# Altium PCB 9..11..13 filter.PcbDoc (part 1 of 2)
Units mil, origin at the board's own origin, x right, y up, seen from the top; angles counter-clockwise.
Board outline 3897.64 x 3897.64 mil, 2 copper layers (Top Layer, Bottom Layer); 210 components, 8 nets, 564 pads, 1454 vias.
Unrouted connection lines stored in the file: 121.
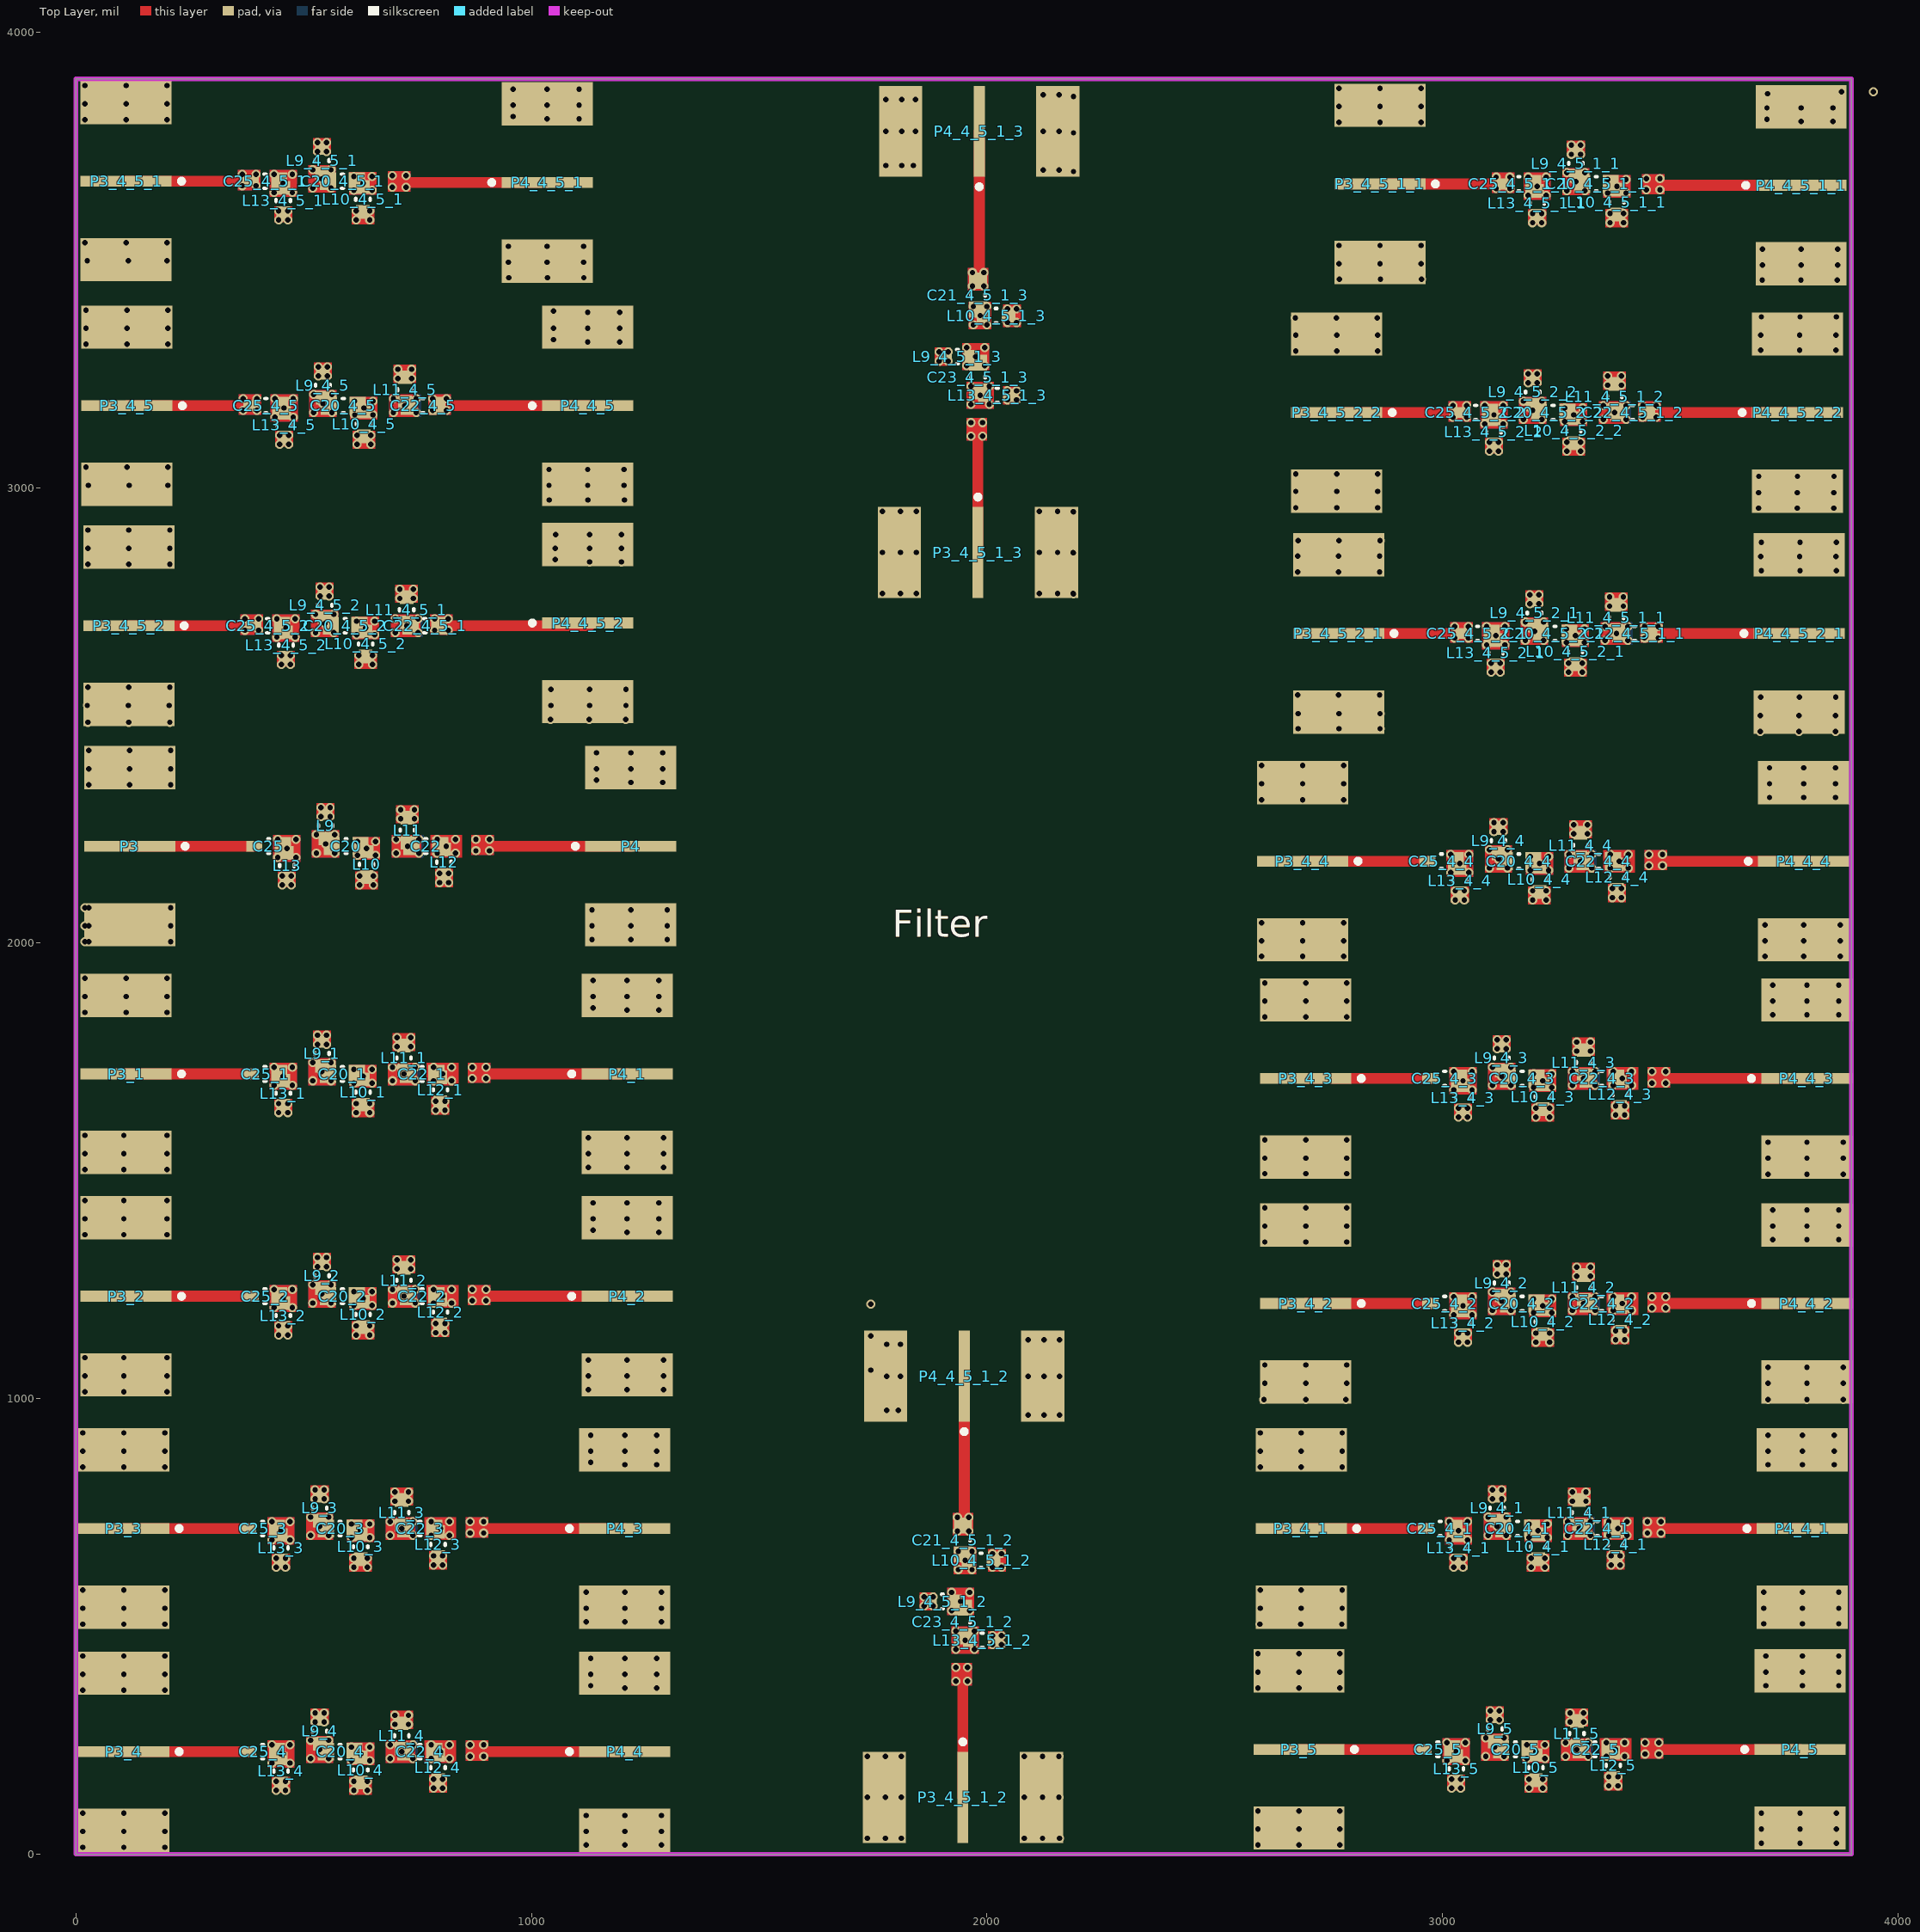
[diagram p0: Top Layer view]
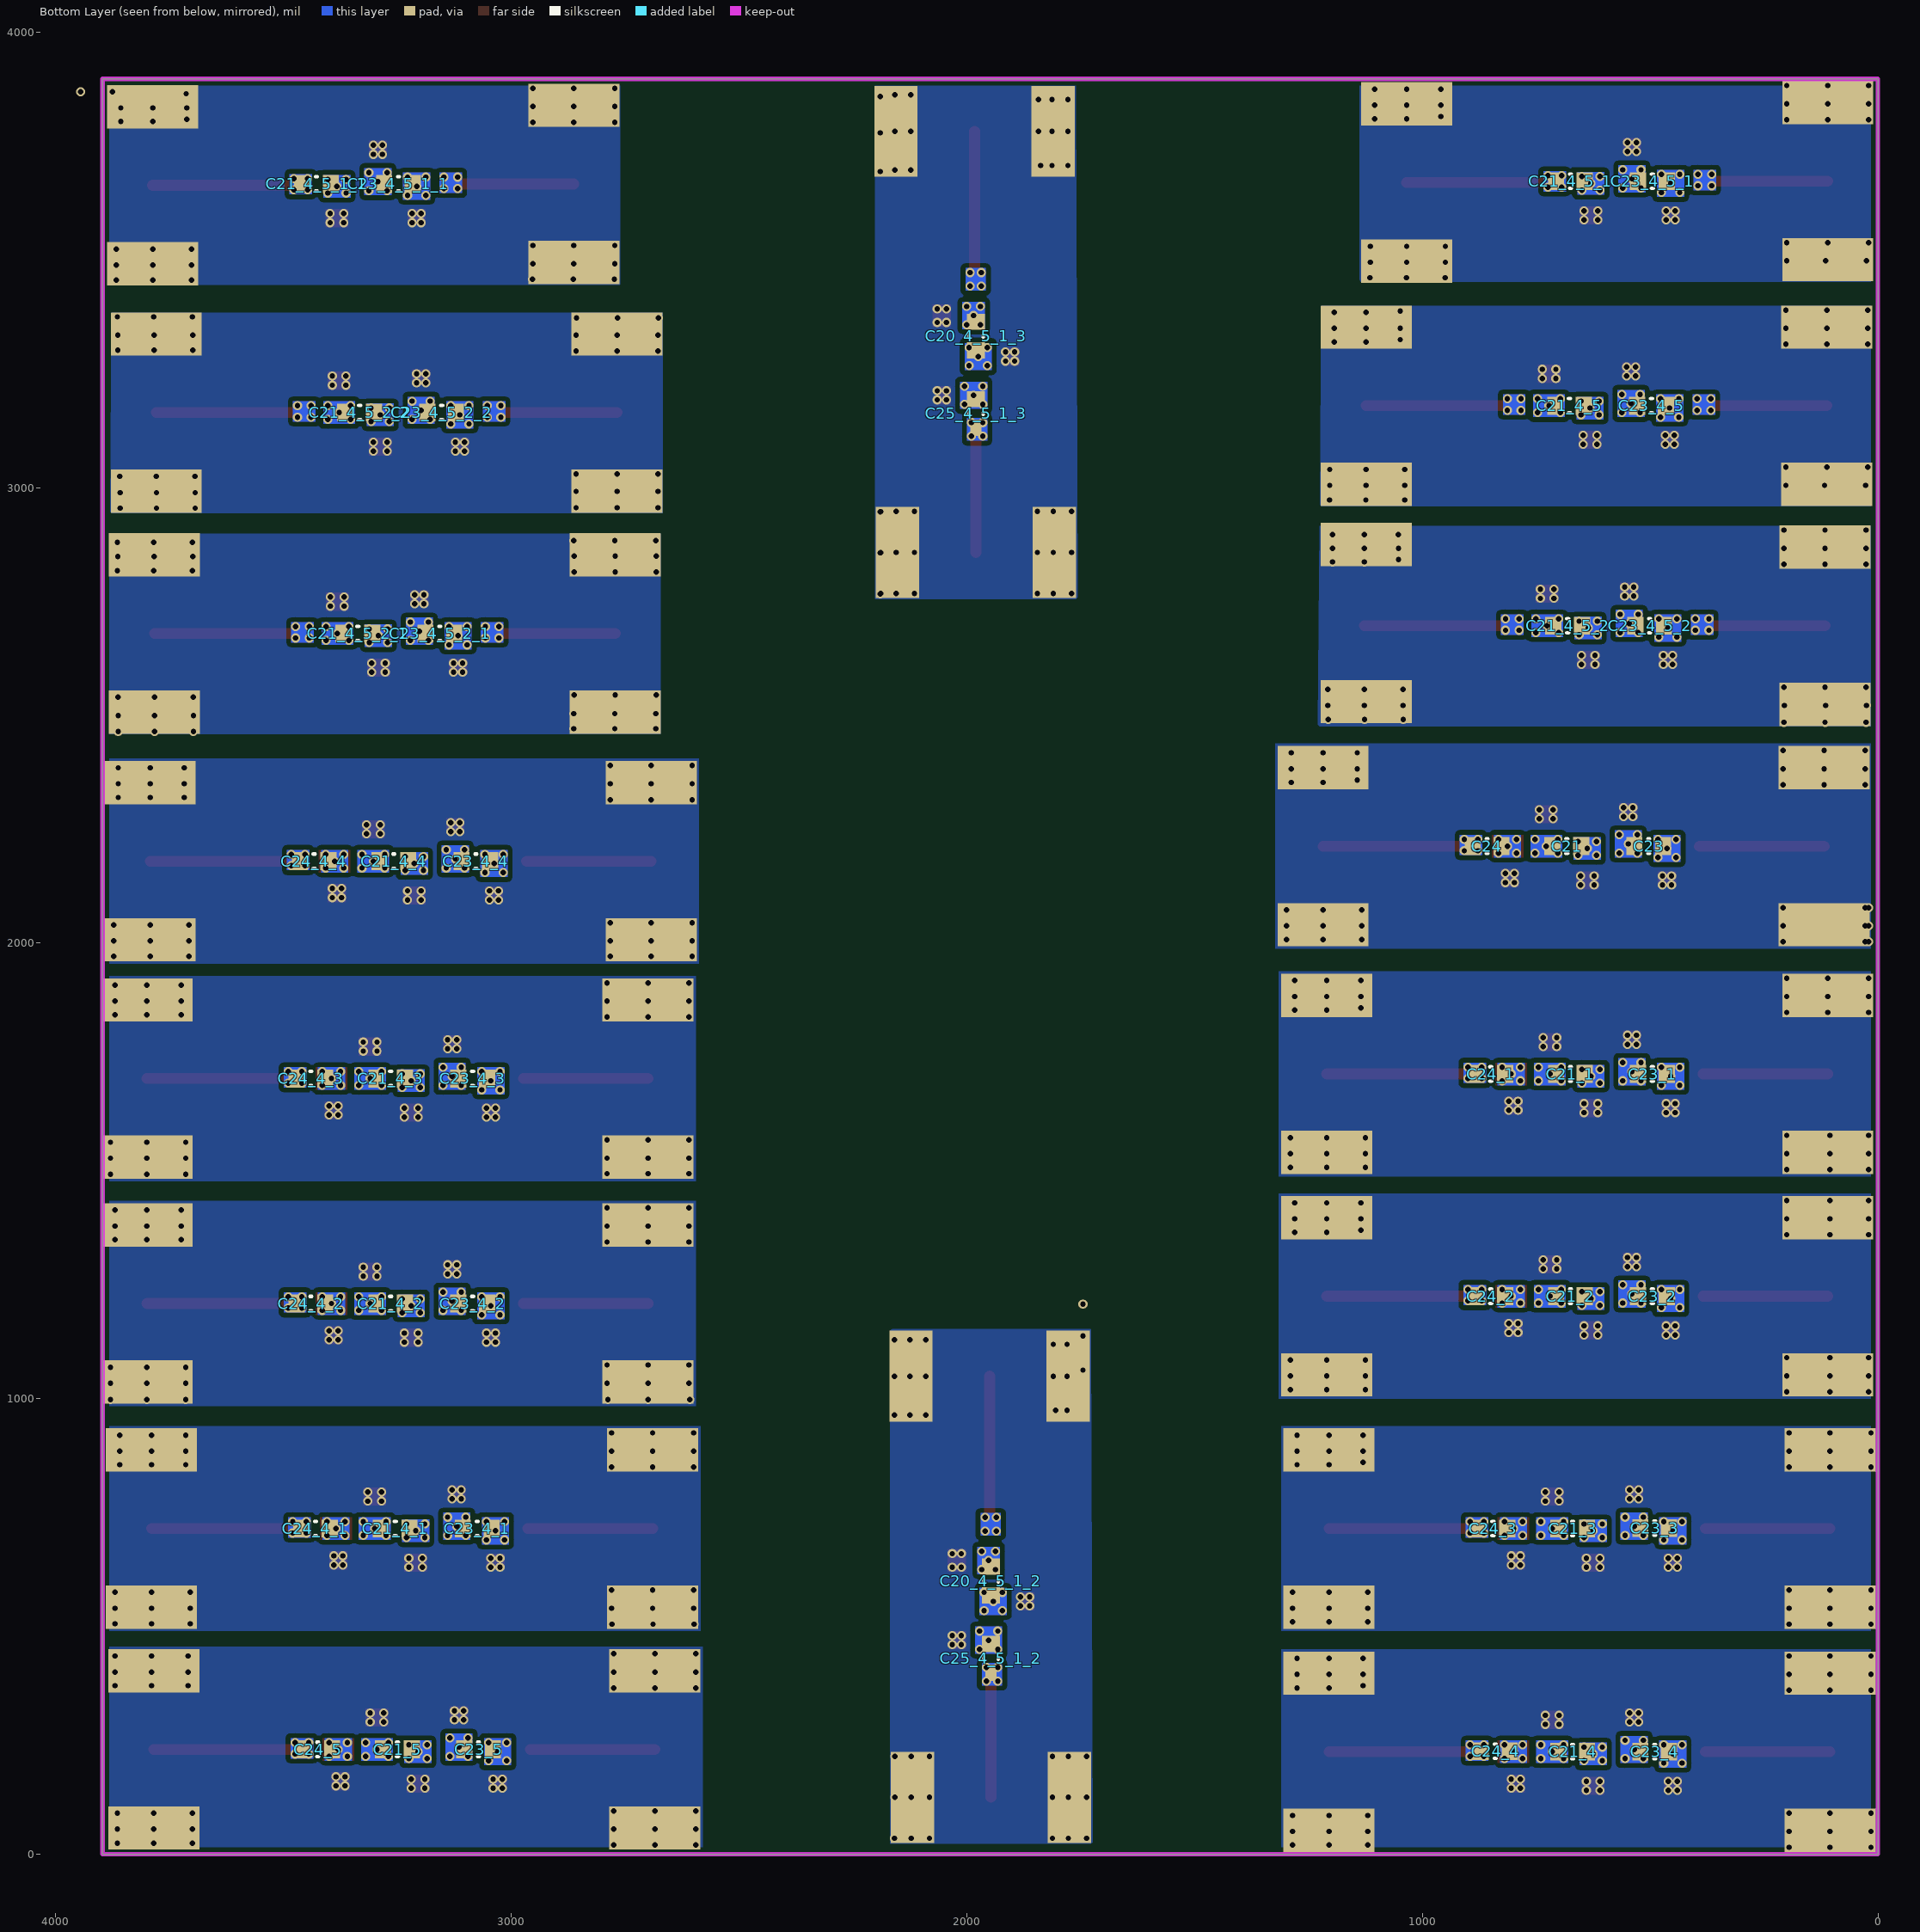
[diagram p1: Bottom Layer view, seen from below]

## Layer stack, top to bottom
Top Solder: solder mask 0.4, Solder Resist, Dk 3.5
Top Layer: signal copper 1.4
Dielectric 1: dielectric 12.6, FR-4, Dk 4.8
Bottom Layer: signal copper 1.4
Bottom Solder: solder mask 0.4, Solder Resist, Dk 3.5

## Board outline
0,0 3897.64,0 3897.64,3897.64 0,3897.64

## Design rules (kind name [scope] priority, off if disabled: settings)
Clearance [All] p1: gap=10 ignorepadtopadclearanceinfootprint=FALSE except(0: Arc-Hole Track-Hole SMDPad-Hole THPad-Hole Via-Hole Fill-Hole Poly-Hole Region-Hole Text-Hole)
PlaneConnect [All] p1: planeconnectstyle=Direct reliefexpansion=20 reliefentries=4 reliefconductorwidth=10 reliefairgap=10
PolygonConnect [All] p1: connectstyle=Direct reliefconductorwidth=10 reliefentries=4 polygonreliefangle="90 Angle" airgapwidth=10
RoutingVias [All] p1: holewidth=28 width=50 viastyle="Through Hole" minholewidth=28 minwidth=50 maxholewidth=28 maxwidth=50
SolderMaskExpansion [All] p1: expansion=4
Width [All] p1: maxlimit=24 minlimit=10 preferedwidth=24
29 further rules are at their usual default settings.

## Classes and differential pairs
component class Sheet1: C20 C21 C22 C23 C24 C25 L9 L10 L11 L12 L13 P3 P4

## Components (designator, comment, footprint, x,y, rotation, side; value= is the part's Value field where it differs from the comment)
C20 "100pF" 0603C#1 593,2213 r0 top
C20_1 "100pF" 0603C#1 585,1713 r0 top (schematic designator C20)
C20_2 "100pF" 0603C#1 585,1225 r0 top (schematic designator C20)
C20_3 "100pF" 0603C#1 580,715 r0 top (schematic designator C20)
C20_4 "100pF" 0603C#1 580,225 r0 top (schematic designator C20)
C20_4_1 "100pF" 0603C#1 3165,715 r0 top (schematic designator C20)
C20_4_2 "100pF" 0603C#1 3175,1209 r0 top (schematic designator C20)
C20_4_3 "100pF" 0603C#1 3175,1703 r0 top (schematic designator C20)
C20_4_4 "100pF" 0603C#1 3168,2180 r0 top (schematic designator C20)
C20_4_5 "100pF" 0603C#1 587,3180 r0 top (schematic designator C20)
C20_4_5_1 "100pF" 0603C#1 585,3673 r0 top (schematic designator C20)
C20_4_5_1_1 "100pF" 0603C#1 3337.88,3666.88 r0 top (schematic designator C20)
C20_4_5_1_2 "100pF" 0603C#1 1947.12,599.88 r90 bottom (schematic designator C20)
C20_4_5_1_3 "100pF" 0603C#1 1980.12,3332.88 r90 bottom (schematic designator C20)
C20_4_5_2 "100pF" 0603C#1 591,2697 r0 top (schematic designator C20)
C20_4_5_2_1 "100pF" 0603C#1 3247,2680 r0 top (schematic designator C20)
C20_4_5_2_2 "100pF" 0603C#1 3243,3165 r0 top (schematic designator C20)
C20_5 "100pF" 0603C#1 3160,230 r0 top (schematic designator C20)
C21 "100pF" 0603C#1 683,2213 r0 bottom
C21_1 "100pF" 0603C#1 675,1713 r0 bottom (schematic designator C21)
C21_2 "100pF" 0603C#1 675,1225 r0 bottom (schematic designator C21)
C21_3 "100pF" 0603C#1 670,715 r0 bottom (schematic designator C21)
C21_4 "100pF" 0603C#1 670,225 r0 bottom (schematic designator C21)
C21_4_1 "100pF" 0603C#1 3255,715 r0 bottom (schematic designator C21)
C21_4_2 "100pF" 0603C#1 3265,1209 r0 bottom (schematic designator C21)
C21_4_3 "100pF" 0603C#1 3265,1703 r0 bottom (schematic designator C21)
C21_4_4 "100pF" 0603C#1 3258,2180 r0 bottom (schematic designator C21)
C21_4_5 "100pF" 0603C#1 677,3180 r0 bottom (schematic designator C21)
C21_4_5_1 "100pF" 0603C#1 675,3673 r0 bottom (schematic designator C21)
C21_4_5_1_1 "100pF" 0603C#1 3427.88,3666.88 r0 bottom (schematic designator C21)
C21_4_5_1_2 "100pF" 0603C#1 1947.12,689.88 r270 top (schematic designator C21)
C21_4_5_1_3 "100pF" 0603C#1 1980.12,3422.88 r270 top (schematic designator C21)
C21_4_5_2 "100pF" 0603C#1 681,2697 r0 bottom (schematic designator C21)
C21_4_5_2_1 "100pF" 0603C#1 3337,2680 r0 bottom (schematic designator C21)
C21_4_5_2_2 "100pF" 0603C#1 3333,3165 r0 bottom (schematic designator C21)
C21_5 "100pF" 0603C#1 3250,230 r0 bottom (schematic designator C21)
C22 "100pF" 0603C#1 768,2213 r0 top
C22_1 "100pF" 0603C#1 760,1713 r0 top (schematic designator C22)
C22_2 "100pF" 0603C#1 760,1225 r0 top (schematic designator C22)
C22_3 "100pF" 0603C#1 755,715 r0 top (schematic designator C22)
C22_4 "100pF" 0603C#1 755,225 r0 top (schematic designator C22)
C22_4_1 "100pF" 0603C#1 3340,715 r0 top (schematic designator C22)
C22_4_2 "100pF" 0603C#1 3350,1209 r0 top (schematic designator C22)
C22_4_3 "100pF" 0603C#1 3350,1703 r0 top (schematic designator C22)
C22_4_4 "100pF" 0603C#1 3343,2180 r0 top (schematic designator C22)
C22_4_5 "100pF" 0603C#1 762,3180 r0 top (schematic designator C22)
C22_4_5_1 "100pF" 0603C#1 766,2697 r0 top (schematic designator C22)
C22_4_5_1_1 "100pF" 0603C#1 3422,2680 r0 top (schematic designator C22)
C22_4_5_1_2 "100pF" 0603C#1 3418,3165 r0 top (schematic designator C22)
C22_5 "100pF" 0603C#1 3335,230 r0 top (schematic designator C22)
C23 "100pF" 0603C#1 503,2213 r0 bottom
C23_1 "100pF" 0603C#1 495,1713 r0 bottom (schematic designator C23)
C23_2 "100pF" 0603C#1 495,1225 r0 bottom (schematic designator C23)
C23_3 "100pF" 0603C#1 490,716 r0 bottom (schematic designator C23)
C23_4 "100pF" 0603C#1 490,225 r0 bottom (schematic designator C23)
C23_4_1 "100pF" 0603C#1 3075,715 r0 bottom (schematic designator C23)
C23_4_2 "100pF" 0603C#1 3085,1209 r0 bottom (schematic designator C23)
C23_4_3 "100pF" 0603C#1 3085,1703 r0 bottom (schematic designator C23)
C23_4_4 "100pF" 0603C#1 3078,2180 r0 bottom (schematic designator C23)
C23_4_5 "100pF" 0603C#1 497,3180 r0 bottom (schematic designator C23)
C23_4_5_1 "100pF" 0603C#1 495,3673 r0 bottom (schematic designator C23)
C23_4_5_1_1 "100pF" 0603C#1 3247.88,3666.88 r0 bottom (schematic designator C23)
C23_4_5_1_2 "100pF" 0603C#1 1947.12,509.88 r270 top (schematic designator C23)
C23_4_5_1_3 "100pF" 0603C#1 1980.12,3242.88 r270 top (schematic designator C23)
C23_4_5_2 "100pF" 0603C#1 501,2697 r0 bottom (schematic designator C23)
C23_4_5_2_1 "100pF" 0603C#1 3157,2680 r0 bottom (schematic designator C23)
C23_4_5_2_2 "100pF" 0603C#1 3153,3165 r0 bottom (schematic designator C23)
C23_5 "100pF" 0603C#1 3072,230 r0 bottom (schematic designator C23)
C24 "100pF" 0603C#1 858,2213 r0 bottom
C24_1 "100pF" 0603C#1 850,1713 r0 bottom (schematic designator C24)
C24_2 "100pF" 0603C#1 850,1225 r0 bottom (schematic designator C24)
C24_3 "100pF" 0603C#1 845,715 r0 bottom (schematic designator C24)
C24_4 "100pF" 0603C#1 840,226 r0 bottom (schematic designator C24)
C24_4_1 "100pF" 0603C#1 3430,715 r0 bottom (schematic designator C24)
C24_4_2 "100pF" 0603C#1 3440,1209 r0 bottom (schematic designator C24)
C24_4_3 "100pF" 0603C#1 3440,1703 r0 bottom (schematic designator C24)
C24_4_4 "100pF" 0603C#1 3433,2180 r0 bottom (schematic designator C24)
C24_5 "100pF" 0603C#1 3425,230 r0 bottom (schematic designator C24)
C25 "100pF" 0603C#2 423,2213 r0 top
C25_1 "100pF" 0603C#2 415,1713 r0 top (schematic designator C25)
C25_2 "100pF" 0603C#2 415,1225 r0 top (schematic designator C25)
C25_3 "100pF" 0603C#2 410,715 r0 top (schematic designator C25)
C25_4 "100pF" 0603C#2 410,225 r0 top (schematic designator C25)
C25_4_1 "100pF" 0603C#2 2995,715 r0 top (schematic designator C25)
C25_4_2 "100pF" 0603C#2 3005,1209 r0 top (schematic designator C25)
C25_4_3 "100pF" 0603C#2 3005,1703 r0 top (schematic designator C25)
C25_4_4 "100pF" 0603C#2 2998,2180 r0 top (schematic designator C25)
C25_4_5 "100pF" 0603C#2 417,3180 r0 top (schematic designator C25)
C25_4_5_1 "100pF" 0603C#2 415,3673 r0 top (schematic designator C25)
C25_4_5_1_1 "100pF" 0603C#2 3167.88,3666.88 r0 top (schematic designator C25)
C25_4_5_1_2 "100pF" 0603C#2 1947.12,429.88 r90 bottom (schematic designator C25)
C25_4_5_1_3 "100pF" 0603C#2 1980.12,3162.88 r90 bottom (schematic designator C25)
C25_4_5_2 "100pF" 0603C#2 421,2697 r0 top (schematic designator C25)
C25_4_5_2_1 "100pF" 0603C#2 3077,2680 r0 top (schematic designator C25)
C25_4_5_2_2 "100pF" 0603C#2 3073,3165 r0 top (schematic designator C25)
C25_5 "100pF" 0603C#2 2990,230 r0 top (schematic designator C25)
L9 "BEAD" 0603L 548,2258 r90 top value=100uH
L9_1 "BEAD" 0603L 540,1758 r90 top value=100uH (schematic designator L9)
L9_2 "BEAD" 0603L 540,1270 r90 top value=100uH (schematic designator L9)
L9_3 "BEAD" 0603L 535,760 r90 top value=100uH (schematic designator L9)
L9_4 "BEAD" 0603L 535,270 r90 top value=100uH (schematic designator L9)
L9_4_1 "BEAD" 0603L 3120,760 r90 top value=100uH (schematic designator L9)
L9_4_2 "BEAD" 0603L 3130,1254 r90 top value=100uH (schematic designator L9)
L9_4_3 "BEAD" 0603L 3130,1748 r90 top value=100uH (schematic designator L9)
L9_4_4 "BEAD" 0603L 3123,2225 r90 top value=100uH (schematic designator L9)
L9_4_5 "BEAD" 0603L 542,3225 r90 top value=100uH (schematic designator L9)
L9_4_5_1 "BEAD" 0603L 540,3718 r90 top value=100uH (schematic designator L9)
L9_4_5_1_1 "BEAD" 0603L 3292.88,3711.88 r90 top value=100uH (schematic designator L9)
L9_4_5_1_2 "BEAD" 0603L 1902.12,554.88 r180 top value=100uH (schematic designator L9)
L9_4_5_1_3 "BEAD" 0603L 1935.12,3287.88 r180 top value=100uH (schematic designator L9)
L9_4_5_2 "BEAD" 0603L 546,2742 r90 top value=100uH (schematic designator L9)
L9_4_5_2_1 "BEAD" 0603L 3202,2725 r90 top value=100uH (schematic designator L9)
L9_4_5_2_2 "BEAD" 0603L 3198,3210 r90 top value=100uH (schematic designator L9)
L9_5 "BEAD" 0603L 3115,275 r90 top value=100uH (schematic designator L9)
L10 "BEAD" 0603L 638,2173 r270 top value=100uH
L10_1 "BEAD" 0603L 630,1673 r270 top value=100uH (schematic designator L10)
L10_2 "BEAD" 0603L 630,1185 r270 top value=100uH (schematic designator L10)
L10_3 "BEAD" 0603L 625,675 r270 top value=100uH (schematic designator L10)
L10_4 "BEAD" 0603L 625,185 r270 top value=100uH (schematic designator L10)
L10_4_1 "BEAD" 0603L 3210,675 r270 top value=100uH (schematic designator L10)
L10_4_2 "BEAD" 0603L 3220,1169 r270 top value=100uH (schematic designator L10)
L10_4_3 "BEAD" 0603L 3220,1663 r270 top value=100uH (schematic designator L10)
L10_4_4 "BEAD" 0603L 3213,2140 r270 top value=100uH (schematic designator L10)
L10_4_5 "BEAD" 0603L 632,3140 r270 top value=100uH (schematic designator L10)
L10_4_5_1 "BEAD" 0603L 630,3633 r270 top value=100uH (schematic designator L10)
L10_4_5_1_1 "BEAD" 0603L 3382.88,3626.88 r270 top value=100uH (schematic designator L10)
L10_4_5_1_2 "BEAD" 0603L 1987.12,644.88 r0 top value=100uH (schematic designator L10)
L10_4_5_1_3 "BEAD" 0603L 2020.12,3377.88 r0 top value=100uH (schematic designator L10)
L10_4_5_2 "BEAD" 0603L 636,2657 r270 top value=100uH (schematic designator L10)
L10_4_5_2_1 "BEAD" 0603L 3292,2640 r270 top value=100uH (schematic designator L10)
L10_4_5_2_2 "BEAD" 0603L 3288,3125 r270 top value=100uH (schematic designator L10)
L10_5 "BEAD" 0603L 3205,190 r270 top value=100uH (schematic designator L10)
L11 "BEAD" 0603L 728,2248 r90 top value=100uH
L11_1 "BEAD" 0603L 720,1748 r90 top value=100uH (schematic designator L11)
L11_2 "BEAD" 0603L 720,1260 r90 top value=100uH (schematic designator L11)
L11_3 "BEAD" 0603L 715,750 r90 top value=100uH (schematic designator L11)
L11_4 "BEAD" 0603L 715,260 r90 top value=100uH (schematic designator L11)
L11_4_1 "BEAD" 0603L 3300,750 r90 top value=100uH (schematic designator L11)
L11_4_2 "BEAD" 0603L 3310,1244 r90 top value=100uH (schematic designator L11)
L11_4_3 "BEAD" 0603L 3310,1738 r90 top value=100uH (schematic designator L11)
L11_4_4 "BEAD" 0603L 3303,2215 r90 top value=100uH (schematic designator L11)
L11_4_5 "BEAD" 0603L 722,3215 r90 top value=100uH (schematic designator L11)
L11_4_5_1 "BEAD" 0603L 726,2732 r90 top value=100uH (schematic designator L11)
L11_4_5_1_1 "BEAD" 0603L 3382,2715 r90 top value=100uH (schematic designator L11)
L11_4_5_1_2 "BEAD" 0603L 3378,3200 r90 top value=100uH (schematic designator L11)
L11_5 "BEAD" 0603L 3295,265 r90 top value=100uH (schematic designator L11)
L12 "BEAD" 0603L 808,2178 r270 top value=100uH
L12_1 "BEAD" 0603L 800,1678 r270 top value=100uH (schematic designator L12)
L12_2 "BEAD" 0603L 800,1190 r270 top value=100uH (schematic designator L12)
L12_3 "BEAD" 0603L 795,680 r270 top value=100uH (schematic designator L12)
L12_4 "BEAD" 0603L 795,190 r270 top value=100uH (schematic designator L12)
L12_4_1 "BEAD" 0603L 3380,680 r270 top value=100uH (schematic designator L12)
L12_4_2 "BEAD" 0603L 3390,1174 r270 top value=100uH (schematic designator L12)
L12_4_3 "BEAD" 0603L 3390,1668 r270 top value=100uH (schematic designator L12)
L12_4_4 "BEAD" 0603L 3383,2145 r270 top value=100uH (schematic designator L12)
L12_5 "BEAD" 0603L 3375,195 r270 top value=100uH (schematic designator L12)
L13 "BEAD" 0603L 463,2170.5 r270 top value=100uH
L13_1 "BEAD" 0603L 455,1670.5 r270 top value=100uH (schematic designator L13)
L13_2 "BEAD" 0603L 455,1182.5 r270 top value=100uH (schematic designator L13)
L13_3 "BEAD" 0603L 450,672.5 r270 top value=100uH (schematic designator L13)
L13_4 "BEAD" 0603L 450,182.5 r270 top value=100uH (schematic designator L13)
L13_4_1 "BEAD" 0603L 3035,672.5 r270 top value=100uH (schematic designator L13)
L13_4_2 "BEAD" 0603L 3045,1166.5 r270 top value=100uH (schematic designator L13)
L13_4_3 "BEAD" 0603L 3045,1660.5 r270 top value=100uH (schematic designator L13)
L13_4_4 "BEAD" 0603L 3038,2137.5 r270 top value=100uH (schematic designator L13)
L13_4_5 "BEAD" 0603L 457,3137.5 r270 top value=100uH (schematic designator L13)
L13_4_5_1 "BEAD" 0603L 455,3630.5 r270 top value=100uH (schematic designator L13)
L13_4_5_1_1 "BEAD" 0603L 3207.88,3624.38 r270 top value=100uH (schematic designator L13)
L13_4_5_1_2 "BEAD" 0603L 1989.62,469.88 r0 top value=100uH (schematic designator L13)
L13_4_5_1_3 "BEAD" 0603L 2022.62,3202.88 r0 top value=100uH (schematic designator L13)
L13_4_5_2 "BEAD" 0603L 461,2654.5 r270 top value=100uH (schematic designator L13)
L13_4_5_2_1 "BEAD" 0603L 3117,2637.5 r270 top value=100uH (schematic designator L13)
L13_4_5_2_2 "BEAD" 0603L 3113,3122.5 r270 top value=100uH (schematic designator L13)
L13_5 "BEAD" 0603L 3030,187.5 r270 top value=100uH (schematic designator L13)
P3 "SMA" SMA 214,2208 r0 top
P3_1 "SMA" SMA 206,1708 r0 top (schematic designator P3)
P3_2 "SMA" SMA 206,1220 r0 top (schematic designator P3)
P3_3 "SMA" SMA 201,710 r0 top (schematic designator P3)
P3_4 "SMA" SMA 201,220 r0 top (schematic designator P3)
P3_4_1 "SMA" SMA 2786,710 r0 top (schematic designator P3)
P3_4_2 "SMA" SMA 2796,1204 r0 top (schematic designator P3)
P3_4_3 "SMA" SMA 2796,1698 r0 top (schematic designator P3)
P3_4_4 "SMA" SMA 2789,2175 r0 top (schematic designator P3)
P3_4_5 "SMA" SMA 208,3175 r0 top (schematic designator P3)
P3_4_5_1 "SMA" SMA 206,3668 r0 top (schematic designator P3)
P3_4_5_1_1 "SMA" SMA 2958.88,3661.88 r0 top (schematic designator P3)
P3_4_5_1_2 "SMA" SMA 1952.12,220.88 r90 top (schematic designator P3)
P3_4_5_1_3 "SMA" SMA 1985.12,2953.88 r90 top (schematic designator P3)
P3_4_5_2 "SMA" SMA 212,2692 r0 top (schematic designator P3)
P3_4_5_2_1 "SMA" SMA 2868,2675 r0 top (schematic designator P3)
P3_4_5_2_2 "SMA" SMA 2864,3160 r0 top (schematic designator P3)
P3_5 "SMA" SMA 2781,225 r0 top (schematic designator P3)
P4 "SMA" SMA 1122,2218 r180 top
P4_1 "SMA" SMA 1114,1718 r180 top (schematic designator P4)
P4_2 "SMA" SMA 1114,1230 r180 top (schematic designator P4)
P4_3 "SMA" SMA 1109,720 r180 top (schematic designator P4)
P4_4 "SMA" SMA 1109,230 r180 top (schematic designator P4)
P4_4_1 "SMA" SMA 3694,720 r180 top (schematic designator P4)
P4_4_2 "SMA" SMA 3704,1214 r180 top (schematic designator P4)
P4_4_3 "SMA" SMA 3704,1708 r180 top (schematic designator P4)
P4_4_4 "SMA" SMA 3697,2185 r180 top (schematic designator P4)
P4_4_5 "SMA" SMA 1027.5,3185 r180 top (schematic designator P4)
P4_4_5_1 "SMA" SMA 938.5,3675 r180 top (schematic designator P4)
P4_4_5_1_1 "SMA" SMA 3691.37,3668.88 r180 top (schematic designator P4)
P4_4_5_1_2 "SMA" SMA 1945.12,953.37 r270 top (schematic designator P4)
P4_4_5_1_3 "SMA" SMA 1978.12,3686.37 r270 top (schematic designator P4)
P4_4_5_2 "SMA" SMA 1027.5,2708 r180 top (schematic designator P4)
P4_4_5_2_1 "SMA" SMA 3687.5,2685 r180 top (schematic designator P4)
P4_4_5_2_2 "SMA" SMA 3683.5,3170 r180 top (schematic designator P4)
P4_5 "SMA" SMA 3689,235 r180 top (schematic designator P4)

## Footprints (in the part's own frame and the unit in brackets; to place one, negate y for a bottom-side part, rotate by r counter-clockwise, add the part's x,y. Pads: shape width x height; smd on the part's side, far side on the other; paste and mask are expansions set on the pad)
0603C#1 [mm] "Chip Capacitor, Body 1.6x0.8mm, Height 1.0mm, IPC Medium Density"
  rect 0.9x1 smd: 1(-0.8,0) 2(0.8,0)
  silkscreen extent -0.05,-0.4 0.05,0.4, body extent -0.87,-0.48 0.88,0.47, height 1
0603C#2 [mm] "Chip Capacitor, Body 1.6x0.8mm, Height 1.0mm, IPC Medium Density"
  rect 0.9x0.61 smd: 1(-0.8,0)
  rect 0.9x1 smd: 2(0.8,0)
  silkscreen extent -0.05,-0.4 0.05,0.4, body extent -0.87,-0.48 0.88,0.47, height 1
0603L [mil] "Bead 0603L"
  rect 30x30 smd: 1(27.5,0) 2(-27.5,0)
  silkscreen extent -2,-16 2,16, body extent -34,-19 34,19, height 24
SMA [mil]
  rect 200x24 smd: 1(-96,5)
  rect 200x95 smd: 2(-96,-167.5) 2(-96,177.5)
  rect 200x95 smd far side: 2(-96,-167.5) 2(-96,177.5) 2(-96,177.5)
  silkscreen extent 21,0 31,10, body extent -571,-183 -9,192, height 171

## Part data
C20 C20_1 C20_2 C20_3 C20_4 C20_4_1 C20_4_2 C20_4_3 C20_4_4 C20_4_5 C20_4_5_1 C20_4_5_1_1 C20_4_5_1_2 C20_4_5_1_3 C20_4_5_2 C20_4_5_2_1 C20_4_5_2_2 C20_5 C21 C21_1 C21_2 C21_3 C21_4 C21_4_1 C21_4_2 C21_4_3 C21_4_4 C21_4_5 C21_4_5_1 C21_4_5_1_1 C21_4_5_1_2 C21_4_5_1_3 C21_4_5_2 C21_4_5_2_1 C21_4_5_2_2 C21_5 C22 C22_1 C22_2 C22_3 C22_4 C22_4_1 C22_4_2 C22_4_3 C22_4_4 C22_4_5 C22_4_5_1 C22_4_5_1_1 C22_4_5_1_2 C22_5 C23 C23_1 C23_2 C23_3 C23_4 C23_4_1 C23_4_2 C23_4_3 C23_4_4 C23_4_5 C23_4_5_1 C23_4_5_1_1 C23_4_5_1_2 C23_4_5_1_3 C23_4_5_2 C23_4_5_2_1 C23_4_5_2_2 C23_5 C24 C24_1 C24_2 C24_3 C24_4 C24_4_1 C24_4_2 C24_4_3 C24_4_4 C24_5 C25 C25_1 C25_2 C25_3 C25_4 C25_4_1 C25_4_2 C25_4_3 C25_4_4 C25_4_5 C25_4_5_1 C25_4_5_1_1 C25_4_5_1_2 C25_4_5_1_3 C25_4_5_2 C25_4_5_2_1 C25_4_5_2_2 C25_5: library part C, "Capacitor"
L9 L9_1 L9_2 L9_3 L9_4 L9_4_1 L9_4_2 L9_4_3 L9_4_4 L9_4_5 L9_4_5_1 L9_4_5_1_1 L9_4_5_1_2 L9_4_5_1_3 L9_4_5_2 L9_4_5_2_1 L9_4_5_2_2 L9_5 L10 L10_1 L10_2 L10_3 L10_4 L10_4_1 L10_4_2 L10_4_3 L10_4_4 L10_4_5 L10_4_5_1 L10_4_5_1_1 L10_4_5_1_2 L10_4_5_1_3 L10_4_5_2 L10_4_5_2_1 L10_4_5_2_2 L10_5 L11 L11_1 L11_2 L11_3 L11_4 L11_4_1 L11_4_2 L11_4_3 L11_4_4 L11_4_5 L11_4_5_1 L11_4_5_1_1 L11_4_5_1_2 L11_5 L12 L12_1 L12_2 L12_3 L12_4 L12_4_1 L12_4_2 L12_4_3 L12_4_4 L12_5 L13 L13_1 L13_2 L13_3 L13_4 L13_4_1 L13_4_2 L13_4_3 L13_4_4 L13_4_5 L13_4_5_1 L13_4_5_1_1 L13_4_5_1_2 L13_4_5_1_3 L13_4_5_2 L13_4_5_2_1 L13_4_5_2_2 L13_5: library part Inductor, "Inductor", Published=8-Jun-2000, Publisher="Altium Limited", Revision="July-2002: Re-released for DXP Platform."
P3 P3_1 P3_2 P3_3 P3_4 P3_4_1 P3_4_2 P3_4_3 P3_4_4 P3_4_5 P3_4_5_1 P3_4_5_1_1 P3_4_5_1_2 P3_4_5_1_3 P3_4_5_2 P3_4_5_2_1 P3_4_5_2_2 P3_5 P4 P4_1 P4_2 P4_3 P4_4 P4_4_1 P4_4_2 P4_4_3 P4_4_4 P4_4_5 P4_4_5_1 P4_4_5_1_1 P4_4_5_1_2 P4_4_5_1_3 P4_4_5_2 P4_4_5_2_1 P4_4_5_2_2 P4_5: "SMA Connector"

## Via types
v1: diameter 20, hole 12, Top Layer to Bottom Layer, tented both sides, 1454 vias

## Nets (pads, with @x,y where several pads share a name; then routed paths per layer and width w, separated by ;. In a path a pad name is that pad's centre, name@x,y a point inside that pad or via, vN(x,y) a via of type N, cw(c..) or ccw(c..) an arc to the next point about the centre after c; other vN are vias at no path point)
GND: L9.1 L9_1.1 L9_2.1 L9_3.1 L9_4.1 L9_4_1.1 L9_4_2.1 L9_4_3.1 L9_4_4.1 L9_4_5.1 L9_4_5_1.1 L9_4_5_1_1.1 L9_4_5_1_2.1 L9_4_5_1_3.1 L9_4_5_2.1 L9_4_5_2_1.1 L9_4_5_2_2.1 L9_5.1 L10.1 L10_1.1 L10_2.1 L10_3.1 L10_4.1 L10_4_1.1 L10_4_2.1 L10_4_3.1 L10_4_4.1 L10_4_5.1 L10_4_5_1.1 L10_4_5_1_1.1 L10_4_5_1_2.1 L10_4_5_1_3.1 L10_4_5_2.1 L10_4_5_2_1.1 L10_4_5_2_2.1 L10_5.1 L11.1 L11_1.1 L11_2.1 L11_3.1 L11_4.1 L11_4_1.1 L11_4_2.1 L11_4_3.1 L11_4_4.1 L11_4_5.1 L11_4_5_1.1 L11_4_5_1_1.1 L11_4_5_1_2.1 L11_5.1 L12.1 L12_1.1 L12_2.1 L12_3.1 L12_4.1 L12_4_1.1 L12_4_2.1 L12_4_3.1 L12_4_4.1 L12_5.1 L13.1 L13_1.1 L13_2.1 L13_3.1 L13_4.1 L13_4_1.1 L13_4_2.1 L13_4_3.1 L13_4_4.1 L13_4_5.1 L13_4_5_1.1 L13_4_5_1_1.1 L13_4_5_1_2.1 L13_4_5_1_3.1 L13_4_5_2.1 L13_4_5_2_1.1 L13_4_5_2_2.1 L13_5.1 P3.2 P3_1.2 P3_2.2 P3_3.2 P3_4.2 P3_4_1.2 P3_4_2.2 P3_4_3.2 P3_4_4.2 P3_4_5.2 P3_4_5_1.2 P3_4_5_1_1.2 P3_4_5_1_2.2 P3_4_5_1_3.2 P3_4_5_2.2 P3_4_5_2_1.2 P3_4_5_2_2.2 P3_5.2 P4.2 P4_1.2 P4_2.2 P4_3.2 P4_4.2 P4_4_1.2 P4_4_2.2 P4_4_3.2 P4_4_4.2 P4_4_5.2 P4_4_5_1.2 P4_4_5_1_1.2 P4_4_5_1_2.2 P4_4_5_1_3.2 P4_4_5_2.2 P4_4_5_2_1.2 P4_4_5_2_2.2 P4_5.2
  other v1: 15,15 105,15 195,15 1120,20 1205,20 1285,20 2595,20 2685,20 2775,20 3700,24 3785,24 3865,24 1737.12,34.88 1777.12,34.88 1812.12,34.88 2082.12,34.88 2122.12,34.88 2159,34.88 15,50 105,50 195,50 1120,50 1205,50 1285,50 2595,55 2685,55 2775,55 3700,55 3785,55 3865,55 1120,85 1205,85 1285,85 15,90 105,90 195,90 3700,90 3785,90 3865,90 2595,95 2685,95 2775,95 1737.12,124.88 1777.12,124.88 1812.12,124.88 2082.12,124.88 2122.12,124.88 2158,124.88 440,140 460,140 610,140 640,140 785,145 805,145 3020,145 3040,145 3190,145 3220,145 3365,150 3385,150 440,160 460,160 610,160 640,160 785,165 805,165 3020,165 3040,165 3190,165 3220,165 3365,170 3385,170 1737.12,214.88 1777.12,214.88 1812.12,214.88 2082.12,214.88 2122.12,214.88 2158,214.88 700,285 730,285 525,290 545,290 3280,290 3310,290 3105,295 3125,295 700,305 730,305 525,310 545,310 3280,310 3310,310 3105,315 3125,315 15,360 105,360 195,360 1205,365 1275,365 2595,365 2685,365 2775,365 1130,370 3710,370 3790,370 3870,370 15,395 105,395 195,395 1130,395 1205,395 1275,395 2595,400 2685,400 2775,400 3710,400 3790,400 3870,400 1130,430 1205,430 1275,430 15,435 105,435 195,435 3710,435 3790,435 3870,435 2595,440 2685,440 2775,440 2012.12,459.88 2032.12,459.88 2012.12,479.88 2032.12,479.88 15,505 105,505 195,505 2599,505 2689,505 2779,505 3705,506 3790,506 3870,506 1120,510 1205,510 1285,510 15,540 105,540 195,540 1120,540 1205,540 1285,540 2600,540 2690,540 2780,540 3705,540 3790,540 3870,540 1862.12,544.88 1882.12,544.88 1862.12,564.88 1882.12,564.88 1120,575 1205,575 1285,575 3705,575 3790,575 3870,575 15,580 105,580 195,580 2600,580 2690,580 2780,580 440,630 460,630 610,630 640,630 2012.12,629.88 2032.12,629.88 3025,630 3045,630 3195,630 3225,630 785,635 805,635 3370,635 3390,635 440,650 460,650 610,650 640,650 3025,650 3045,650 3195,650 3225,650 785,655 805,655 3370,655 3390,655 2012.12,659.88 2032.12,659.88 700,775 730,775 3285,775 3315,775 525,780 545,780 3110,780 3130,780 700,795 730,795 3285,795 3315,795 525,800 545,800 3110,800 3130,800 15,850 105,850 195,850 2600,850 2690,850 2780,850 1205,855 1275,855 3715,855 3790,855 3860,855 1130,860 15,885 105,885 195,885 1130,885 1205,885 1275,885 2600,885 2690,885 2780,885 3715,885 3790,885 3860,885 1130,920 1205,920 1275,920 3715,920 3790,920 3860,920 15,925 105,925 195,925 2600,925 2690,925 2780,925 2090.12,964.37 2125.12,964.37 2159,964 1780.12,974.37 1805.12,974.37 2608,998 2700,998 2788,998 3715,998 3800,998 3880,998 20,1015 105,1015 200,1015 1125,1020 1210,1020 1290,1020 2610,1034 2700,1034 2790,1034 3715,1034 3800,1034 3880,1034 1780.12,1049.37 1810.12,1049.37 2090.12,1049.37 2125.12,1049.37 2159,1049 20,1050 105,1050 200,1050 1125,1050 1210,1050 1290,1050 1745.12,1062.88 3715,1069 3800,1069 3880,1069 2610,1074 2700,1074 2790,1074 1125,1085 1210,1085 1290,1085 20,1090 105,1090 200,1090 1780.12,1119.37 1810.12,1119.37 3035,1124 3055,1124 3205,1124 3235,1124 2090.12,1129.37 2125.12,1129.37 2159,1129 3380,1129 3400,1129 1745.12,1137.88 445,1140 465,1140 615,1140 645,1140 3035,1144 3055,1144 3205,1144 3235,1144 790,1145 810,1145 3380,1149 3400,1149 445,1160 465,1160 615,1160 645,1160 790,1165 810,1165 1745.12,1207.88 3295,1269 3325,1269 3120,1274 3140,1274 705,1285 735,1285 3295,1289 3325,1289 530,1290 550,1290 3120,1294 3140,1294 705,1305 735,1305 530,1310 550,1310 2610,1344 2700,1344 2790,1344 3725,1349 3800,1349 3870,1349 20,1360 105,1360 200,1360 1210,1365 1280,1365 1135,1370 2610,1379 2700,1379 2790,1379 3725,1379 3800,1379 3870,1379 20,1395 105,1395 200,1395 1135,1395 1210,1395 1280,1395 3725,1414 3800,1414 3870,1414 2610,1419 2700,1419 2790,1419 1135,1430 1210,1430 1280,1430 20,1435 105,1435 200,1435 3715,1493 3800,1493 3880,1493 2610,1494 2700,1494 2790,1494 20,1503 105,1503 200,1503 1125,1508 1210,1508 1290,1508 2610,1528 2700,1528 2790,1528 3715,1528 3800,1528 3880,1528 20,1538 105,1538 200,1538 1125,1538 1210,1538 1290,1538 3715,1563 3800,1563 3880,1563 2610,1568 2700,1568 2790,1568 1125,1573 1210,1573 1290,1573 20,1578 105,1578 200,1578 3035,1618 3055,1618 3205,1618 3235,1618 3380,1623 3400,1623 445,1628 465,1628 615,1628 645,1628 790,1633 810,1633 3035,1638 3055,1638 3205,1638 3235,1638 3380,1643 3400,1643 445,1648 465,1648 615,1648 645,1648 790,1653 810,1653 3295,1763 3325,1763 3120,1768 3140,1768 705,1773 735,1773 530,1778 550,1778 3295,1783 3325,1783 3120,1788 3140,1788 705,1793 735,1793 530,1798 550,1798 2610,1838 2700,1838 2790,1838 3725,1843 3800,1843 3870,1843 20,1848 110,1848 200,1848 1210,1853 1280,1853 1135,1858 2610,1873 2700,1873 2790,1873 3725,1873 3800,1873 3870,1873 20,1883 110,1883 200,1883 1135,1883 1210,1883 1280,1883 3725,1908 3800,1908 3870,1908 2610,1913 2700,1913 2790,1913 1135,1918 1210,1918 1280,1918 20,1923 110,1923 200,1923 2603,1971 2693,1971 2783,1971 3708,1971 3793,1971 3873,1971 20,2003 28,2003 208,2003 2603,2005 2693,2005 2783,2005 3708,2005 3793,2005 3873,2005 1133,2008 1218,2008 1298,2008 20,2038 28,2038 208,2038 1133,2038 1218,2038 1298,2038 3708,2040 3793,2040 3873,2040 2603,2045 2693,2045 2783,2045 1133,2073 1218,2073 1298,2073 20,2078 28,2078 208,2078 3028,2095 3048,2095 3198,2095 3228,2095 3373,2100 3393,2100 3028,2115 3048,2115 3198,2115 3228,2115 3373,2120 3393,2120 453,2128 473,2128 623,2128 653,2128 798,2133 818,2133 453,2148 473,2148 623,2148 653,2148 798,2153 818,2153 3288,2240 3318,2240 3113,2245 3133,2245 3288,2260 3318,2260 3113,2265 3133,2265 713,2273 743,2273 538,2278 558,2278 713,2293 743,2293 538,2298 558,2298 2603,2315 2693,2315 2783,2315 3718,2320 3793,2320 3863,2320 28,2348 118,2348 208,2348 2603,2350 2693,2350 2783,2350 3718,2350 3793,2350 3863,2350 1218,2353 1288,2353 1143,2358 28,2383 118,2383 208,2383 1143,2383 1218,2383 1288,2383 3718,2385 3793,2385 3863,2385 2603,2390 2693,2390 2783,2390 1143,2418 1218,2418 1288,2418 28,2423 118,2423 208,2423 3698,2465 3783,2465 3863,2465 2683,2471 2773,2471 2863,2471 26,2485 116,2485 206,2485 1042,2491 1127,2491 1207,2491 3698,2500 3783,2500 3863,2500 2683,2504 2683,2504 2773,2504 2773,2504 2863,2504 2863,2504 25,2522 115,2522 205,2522 1042.5,2522 1127.5,2522 1207.5,2522 3698.5,2540 3783.5,2540 3863.5,2540 2682,2545 2772,2545 2862,2545 1042.5,2557 1127.5,2557 1207.5,2557 26,2562 116,2562 206,2562 3107,2595 3127,2595 3277,2595 3307,2595 451,2612 471,2612 621,2612 651,2612 3107,2615 3127,2615 3277,2615 3307,2615 451,2632 471,2632 621,2632 651,2632 3367,2740 3397,2740 3192,2745 3212,2745 711,2757 741,2757 3367,2760 3397,2760 536,2762 556,2762 3192,2765 3212,2765 2190,2767 1770.12,2767.88 1810.12,2767.88 1845.12,2767.88 2115.12,2767.88 2155.12,2767.88 2189,2767.5 711,2777 741,2777 536,2782 556,2782 2682,2815 2772,2815 2862,2815 3700,2818 3785,2818 3865,2818 26,2832 116,2832 206,2832 1127.5,2837 1197.5,2837 1052.5,2842 3699,2849 3784,2849 3864,2849 2682,2850 2772,2850 2862,2850 2190,2857 1770.12,2857.88 1810.12,2857.88 1845.12,2857.88 2115.12,2857.88 2155.12,2857.88 2189,2857.5 26,2867 116,2867 206,2867 1052.5,2867 1127.5,2867 1197.5,2867 3700,2880 3785,2880 3865,2880 2683,2884 2773,2884 2863,2884 1053,2897 1127.5,2897 1197.5,2897 26,2907 116,2907 206,2907 2190,2947 1770.12,2947.88 1810.12,2947.88 1845.12,2947.88 2115.12,2947.88 2155.12,2947.88 2189,2947.5 3694,2955 3779,2955 3859,2955 2678,2956 2768,2956 2858,2956 1039,2973 1124,2973 1204,2973 3694,2989 3779,2989 3859,2989 2678,2992 2768,2992 2858,2992 27,3005 117,3005 202,3005 1038.5,3005 1123.5,3005 1203.5,3005 3694.5,3025 3779.5,3025 3859.5,3025 2678,3030 2768,3030 2858,3030 1038.5,3040 1123.5,3040 1203.5,3040 22,3045 112,3045 202,3045 3103,3080 3123,3080 3273,3080 3303,3080 447,3095 467,3095 617,3095 647,3095 3103,3100 3123,3100 3273,3100 3303,3100 447,3115 467,3115 617,3115 647,3115 2045.12,3192.88 2065.12,3192.88 2045.12,3212.88 2065.12,3212.88 3363,3225 3393,3225 3188,3230 3208,3230 707,3240 737,3240 532,3245 552,3245 3363,3245 3393,3245 3188,3250 3208,3250 707,3260 737,3260 532,3265 552,3265 1895.12,3277.88 1915.12,3277.88 1895.12,3297.88 1915.12,3297.88 2678,3300 2768,3300 2858,3300 3699,3302 3784,3302 3864,3302 22,3315 112,3315 202,3315 1123.5,3320 1193.5,3320 1048.5,3325 2678,3335 2768,3335 2858,3335 3699,3335 3784,3335 3864,3335 22,3350 112,3350 202,3350 1048.5,3350 1123.5,3350 1193.5,3350 2045.12,3362.88 2065.12,3362.88 2677,3373 2767,3373 2857,3373 3700,3375 3785,3375 3865,3375 1123.5,3385 1193.5,3385 1048.5,3388 22,3390 112,3390 202,3390 2045.12,3392.88 2065.12,3392.88 3702,3456 3787,3456 3867,3456 2774,3458 2864,3458 2954,3458 950,3461 1035,3461 1115,3461 3702.37,3488.88 3787.37,3488.88 3867.37,3488.88 2772.88,3491.88 2862.88,3491.88 2952.88,3491.88 949.5,3495 1034.5,3495 1114.5,3495 25,3498 115,3498 200,3498 3702.37,3523.88 3787.37,3523.88 3867.37,3523.88 949.5,3530 1034.5,3530 1114.5,3530 2772.88,3531.88 2862.88,3531.88 2952.88,3531.88 20,3538 110,3538 200,3538 3197.88,3581.88 3217.88,3581.88 3367.88,3581.88 3397.88,3581.88 445,3588 465,3588 615,3588 645,3588 3197.88,3601.88 3217.88,3601.88 3367.88,3601.88 3397.88,3601.88 445,3608 465,3608 615,3608 645,3608 2190,3694 2123.12,3697.37 2158.12,3697.37 1778.12,3707.37 1813.12,3707.37 1838.12,3707.37 3282.88,3731.88 3302.88,3731.88 530,3738 550,3738 3282.88,3751.88 3302.88,3751.88 530,3758 550,3758 2190,3779 1778.12,3782.37 1813.12,3782.37 1843.12,3782.37 2123.12,3782.37 2158.12,3782.37 2772.88,3801.88 2862.88,3801.88 2952.88,3801.88 3787.37,3803.88 3857.37,3803.88 20,3808 110,3808 200,3808 3712.37,3808.88 1034.5,3810 1104.5,3810 959.5,3815 3712.37,3833.88 3787.37,3833.88 3857.37,3833.88 2772.88,3836.88 2862.88,3836.88 2952.88,3836.88 959.5,3840 1034.5,3840 1104.5,3840 20,3843 110,3843 200,3843 1778.12,3852.37 1813.12,3852.37 1843.12,3852.37 2190,3859 2123.12,3862.37 2158.12,3862.37 3714,3865 3875.88,3868.88 3945.88,3868.88 959.5,3875 1034.5,3875 1104.5,3875 2772.88,3876.88 2862.88,3876.88 2952.88,3876.88 20,3883 110,3883 200,3883